# EAGLE board breakouts1-old (EAGLE 4.15)
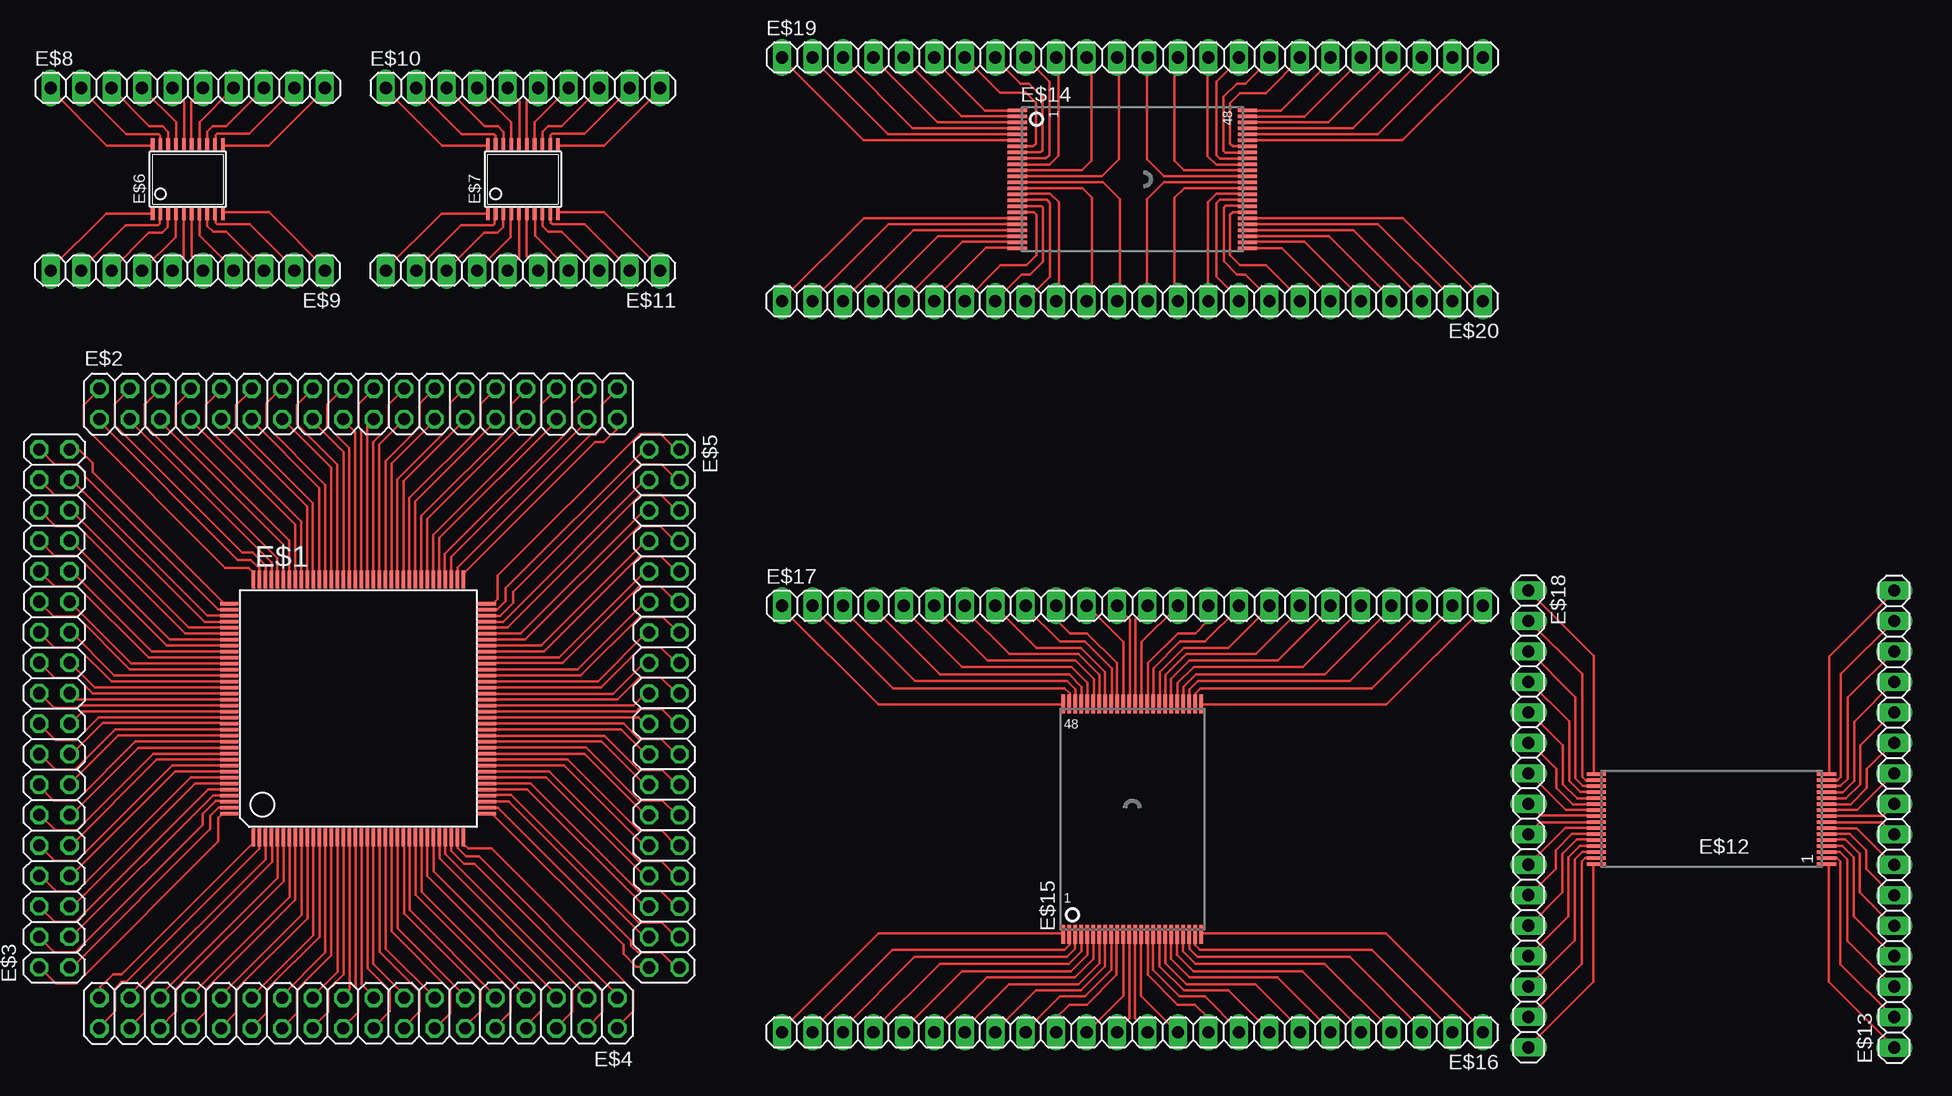
[diagram p0: board, top side]

No outline drawn. Coordinates in mm, seen from the top.
Copper layers (1*16): Top 0.035mm / dielectric 1.5mm / Bottom 0.035mm
Design rules "default": minimum track width 10mil, minimum drill 24mil, track to track 8mil, track to pad 8mil, pad to pad 8mil, via to via 8mil, smd to smd 8mil, copper to edge 40mil, drill to drill 8mil, minimum pad ring 10mil, minimum via ring 8mil, stop-mask expansion 4mil, vias tented up to drill 0mil, thermal gap 10mil

## Footprints (pad centres in the part's own frame; a part is rotated, then mirrored left to right if it is on the bottom)
TQFP144 = smd 0.27 x 1.5: 1 -8.75,-10.75; 2 -8.25,-10.75; 3 -7.75,-10.75; 4 -7.25,-10.75; 5 -6.75,-10.75; 6 -6.25,-10.75; 7 -5.75,-10.75; 8 -5.25,-10.75; 9 -4.75,-10.75; 10 -4.25,-10.75; 11 -3.75,-10.75; 12 -3.25,-10.75; 13 -2.75,-10.75; 14 -2.25,-10.75; 15 -1.75,-10.75; 16 -1.25,-10.75; 17 -0.75,-10.75; 18 -0.25,-10.75; 19 0.25,-10.75; 20 0.75,-10.75; 21 1.25,-10.75; 22 1.75,-10.75; 23 2.25,-10.75; 24 2.75,-10.75; 25 3.25,-10.75; 26 3.75,-10.75; 27 4.25,-10.75; 28 4.75,-10.75; 29 5.25,-10.75; 30 5.75,-10.75; 31 6.25,-10.75; 32 6.75,-10.75; 33 7.25,-10.75; 34 7.75,-10.75; 35 8.25,-10.75; 36 8.75,-10.75; 73 8.75,10.75; 74 8.25,10.75; 75 7.75,10.75; 76 7.25,10.75; 77 6.75,10.75; 78 6.25,10.75; 79 5.75,10.75; 80 5.25,10.75; 81 4.75,10.75; 82 4.25,10.75; 83 3.75,10.75; 84 3.25,10.75; 85 2.75,10.75; 86 2.25,10.75; 87 1.75,10.75; 88 1.25,10.75; 89 0.75,10.75; 90 0.25,10.75; 91 -0.25,10.75; 92 -0.75,10.75; 93 -1.25,10.75; 94 -1.75,10.75; 95 -2.25,10.75; 96 -2.75,10.75; 97 -3.25,10.75; 98 -3.75,10.75; 99 -4.25,10.75; 100 -4.75,10.75; 101 -5.25,10.75; 102 -5.75,10.75; 103 -6.25,10.75; 104 -6.75,10.75; 105 -7.25,10.75; 106 -7.75,10.75; 107 -8.25,10.75; 108 -8.75,10.75 | smd 1.5 x 0.27: 37 10.75,-8.75; 38 10.75,-8.25; 39 10.75,-7.75; 40 10.75,-7.25; 41 10.75,-6.75; 42 10.75,-6.25; 43 10.75,-5.75; 44 10.75,-5.25; 45 10.75,-4.75; 46 10.75,-4.25; 47 10.75,-3.75; 48 10.75,-3.25; 49 10.75,-2.75; 50 10.75,-2.25; 51 10.75,-1.75; 52 10.75,-1.25; 53 10.75,-0.75; 54 10.75,-0.25; 55 10.75,0.25; 56 10.75,0.75; 57 10.75,1.25; 58 10.75,1.75; 59 10.75,2.25; 60 10.75,2.75; 61 10.75,3.25; 62 10.75,3.75; 63 10.75,4.25; 64 10.75,4.75; 65 10.75,5.25; 66 10.75,5.75; 67 10.75,6.25; 68 10.75,6.75; 69 10.75,7.25; 70 10.75,7.75; 71 10.75,8.25; 72 10.75,8.75; 109 -10.75,8.75; 110 -10.75,8.25; 111 -10.75,7.75; 112 -10.75,7.25; 113 -10.75,6.75; 114 -10.75,6.25; 115 -10.75,5.75; 116 -10.75,5.25; 117 -10.75,4.75; 118 -10.75,4.25; 119 -10.75,3.75; 120 -10.75,3.25; 121 -10.75,2.75; 122 -10.75,2.25; 123 -10.75,1.75; 124 -10.75,1.25; 125 -10.75,0.75; 126 -10.75,0.25; 127 -10.75,-0.25; 128 -10.75,-0.75; 129 -10.75,-1.25; 130 -10.75,-1.75; 131 -10.75,-2.25; 132 -10.75,-2.75; 133 -10.75,-3.25; 134 -10.75,-3.75; 135 -10.75,-4.25; 136 -10.75,-4.75; 137 -10.75,-5.25; 138 -10.75,-5.75; 139 -10.75,-6.25; 140 -10.75,-6.75; 141 -10.75,-7.25; 142 -10.75,-7.75; 143 -10.75,-8.25; 144 -10.75,-8.75
2X18 = drill 1.016 octagon: 1 -21.59,-1.27; 2 -21.59,1.27; 3 -19.05,-1.27; 4 -19.05,1.27; 5 -16.51,-1.27; 6 -16.51,1.27; 7 -13.97,-1.27; 8 -13.97,1.27; 9 -11.43,-1.27; 10 -11.43,1.27; 11 -8.89,-1.27; 12 -8.89,1.27; 13 -6.35,-1.27; 14 -6.35,1.27; 15 -3.81,-1.27; 16 -3.81,1.27; 17 -1.27,-1.27; 18 -1.27,1.27; 19 1.27,-1.27; 20 1.27,1.27; 21 3.81,-1.27; 22 3.81,1.27; 23 6.35,-1.27; 24 6.35,1.27; 25 8.89,-1.27; 26 8.89,1.27; 27 11.43,-1.27; 28 11.43,1.27; 29 13.97,-1.27; 30 13.97,1.27; 31 16.51,-1.27; 32 16.51,1.27; 33 19.05,-1.27; 34 19.05,1.27; 35 21.59,-1.27; 36 21.59,1.27
TSSOP20 = smd 0.305 x 0.991: 1 -2.925,-2.918; 2 -2.275,-2.918; 3 -1.625,-2.918; 4 -0.975,-2.918; 5 -0.325,-2.918; 6 0.325,-2.918; 7 0.975,-2.918; 8 1.625,-2.918; 9 2.275,-2.918; 10 2.925,-2.918; 11 2.925,2.918; 12 2.275,2.918; 13 1.625,2.918; 14 0.975,2.918; 15 0.325,2.918; 16 -0.325,2.918; 17 -0.975,2.918; 18 -1.625,2.918; 19 -2.275,2.918; 20 -2.925,2.918
1X10 = drill 1.016 long: 1 -11.43,0; 2 -8.89,0; 3 -6.35,0; 4 -3.81,0; 5 -1.27,0; 6 1.27,0; 7 3.81,0; 8 6.35,0; 9 8.89,0; 10 11.43,0
TSOP32 = smd 0.3 x 1.6: 1 -3.75,-9.6; 2 -3.25,-9.6; 3 -2.75,-9.6; 4 -2.25,-9.6; 5 -1.75,-9.6; 6 -1.25,-9.6; 7 -0.75,-9.6; 8 -0.25,-9.6; 9 0.25,-9.6; 10 0.75,-9.6; 11 1.25,-9.6; 12 1.75,-9.6; 13 2.25,-9.6; 14 2.75,-9.6; 15 3.25,-9.6; 16 3.75,-9.6; 17 3.75,9.59; 18 3.25,9.59; 19 2.75,9.59; 20 2.25,9.59; 21 1.75,9.59; 22 1.25,9.59; 23 0.75,9.59; 24 0.25,9.59; 25 -0.25,9.59; 26 -0.75,9.59; 27 -1.25,9.59; 28 -1.75,9.59; 29 -2.25,9.59; 30 -2.75,9.59; 31 -3.25,9.59; 32 -3.75,9.59
1X16 = drill 1.016 long: 1 -19.05,0; 2 -16.51,0; 3 -13.97,0; 4 -11.43,0; 5 -8.89,0; 6 -6.35,0; 7 -3.81,0; 8 -1.27,0; 9 1.27,0; 10 3.81,0; 11 6.35,0; 12 8.89,0; 13 11.43,0; 14 13.97,0; 15 16.51,0; 16 19.05,0
TSOP48 = smd 0.3 x 1.6: 1 -5.75,-9.6; 2 -5.25,-9.6; 3 -4.75,-9.6; 4 -4.25,-9.6; 5 -3.75,-9.6; 6 -3.25,-9.6; 7 -2.75,-9.6; 8 -2.25,-9.6; 9 -1.75,-9.6; 10 -1.25,-9.6; 11 -0.75,-9.6; 12 -0.25,-9.6; 13 0.25,-9.6; 14 0.75,-9.6; 15 1.25,-9.6; 16 1.75,-9.6; 17 2.25,-9.6; 18 2.75,-9.6; 19 3.25,-9.6; 20 3.75,-9.6; 21 4.25,-9.6; 22 4.75,-9.6; 23 5.25,-9.6; 24 5.75,-9.6; 25 5.75,9.6; 26 5.25,9.6; 27 4.75,9.6; 28 4.25,9.6; 29 3.75,9.6; 30 3.25,9.6; 31 2.75,9.6; 32 2.25,9.6; 33 1.75,9.6; 34 1.25,9.6; 35 0.75,9.6; 36 0.25,9.6; 37 -0.25,9.6; 38 -0.75,9.6; 39 -1.25,9.6; 40 -1.75,9.6; 41 -2.25,9.6; 42 -2.75,9.6; 43 -3.25,9.6; 44 -3.75,9.6; 45 -4.25,9.6; 46 -4.75,9.6; 47 -5.25,9.6; 48 -5.75,9.6
1X24 = drill 1.016 long: 1 -29.21,0; 2 -26.67,0; 3 -24.13,0; 4 -21.59,0; 5 -19.05,0; 6 -16.51,0; 7 -13.97,0; 8 -11.43,0; 9 -8.89,0; 10 -6.35,0; 11 -3.81,0; 12 -1.27,0; 13 1.27,0; 14 3.81,0; 15 6.35,0; 16 8.89,0; 17 11.43,0; 18 13.97,0; 19 16.51,0; 20 19.05,0; 21 21.59,0; 22 24.13,0; 23 26.67,0; 24 29.21,0

## Placement (x,y rotation side)
E$1  [TQFP144]  29.47,29.53 0 top
E$2  [2X18]  29.47,54.93 0 top
E$3  [2X18]  4.12,29.55 90 top
E$4  [2X18]  29.46,4.14 180 top
E$5  [2X18]  54.96,29.53 270 top
E$6  [TSSOP20]  15.24,73.66 0 top
E$7  [TSSOP20]  43.18,73.66 0 top
E$8  [1X10]  15.24,81.28 0 top
E$9  [1X10]  15.24,66.05 180 top
E$10  [1X10]  43.18,81.28 0 top
E$11  [1X10]  43.18,66.05 180 top
E$12  [TSOP32]  142.24,20.32 90 top
E$13  [1X16]  157.48,20.32 90 top
E$14  [TSOP48]  93.98,73.66 270 top
E$15  [TSOP48]  93.98,20.32 0 top
E$16  [1X24]  93.98,2.54 180 top
E$17  [1X24]  93.98,38.1 0 top
E$18  [1X16]  127,20.33 270 top
E$19  [1X24]  93.98,83.82 0 top
E$20  [1X24]  93.98,63.5 180 top

## Library data of the parts
E$1 E$6 E$7 = ref-packages
E$2-E$5 E$8-E$11 E$13 E$16-E$20 = pinhead
E$12 = atmel
E$14 E$15 = am29-memory

## Tracks (layer width: path | path; a pad name or v marks a point on that pad's centre or on a via)
S$1
  Top 0.2: 23.72,40.74 23.72,43.56 14.22,53.06 14.22,54.79 15.56,56.12
S$2
  Top 0.2: 7.85,53.72 7.82,53.7
S$3
  Top 0.2: 23.2,40.84 23.2,43.19 12.94,53.45
S$4
  Top 0.2: 22.7,40.74 22.7,42.11 11.65,53.15 11.65,54.88 12.94,56.17
S$5
  Top 0.2: 22.23,40.77 22.23,41.71 10.47,53.48
S$6
  Top 0.2: 21.74,40.79 21.74,41.46 20.65,42.55 19.76,42.55 9.13,53.18 9.13,54.93 10.37,56.17
S$7
  Top 0.2: 21.2,40.74 21.2,41.24 20.5,41.93 19.42,41.93 7.77,53.58
S$8
  Top 0.2: 20.73,40.72 20.73,40.87 20.33,41.26 18.38,41.26 6.56,53.08 6.56,54.84 7.95,56.22
S$9
  Top 0.2: 24.21,40.74 24.21,44.87 15.46,53.62
S$10
  Top 0.2: 24.7,40.77 24.7,45.12 16.77,53.06 16.77,54.88 18.05,56.17
S$11
  Top 0.2: 25.2,40.45 25.2,46.38 18.01,53.58
S$12
  Top 0.2: 25.67,40.77 25.67,46.68 19.29,53.06 19.29,54.84 20.55,56.1
S$13
  Top 0.2: 26.19,40.77 26.19,47.94 20.55,53.58 20.55,53.55
S$14
  Top 0.2: 26.71,40.74 26.71,48.19 21.81,53.08 21.81,55.01 23.05,56.24
S$15
  Top 0.2: 27.2,40.67 27.2,49.62 23.12,53.7
S$16
  Top 0.2: 27.7,40.74 27.7,49.87 24.36,53.2 24.36,54.86 25.62,56.12
S$17
  Top 0.2: 28.24,40.79 28.24,50.91 25.62,53.52
S$18
  Top 0.2: 28.71,40.7 28.71,51.25 26.86,53.1 26.86,54.86 28.16,56.17
S$19
  Top 0.2: 29.2,40.7 29.2,52.59 28.19,53.6
S$20
  Top 0.2: 29.7,40.62 29.7,52.81 29.5,53.01 29.5,54.93 30.76,56.2 30.76,56.15
S$21
  Top 0.2: 30.19,40.82 30.19,53.03 30.76,53.6
S$22
  Top 0.2: 30.71,40.77 30.71,51.74 32,53.03 32,54.88 33.21,56.1
S$23
  Top 0.2: 31.2,40.79 31.2,51.55 33.26,53.6
S$24
  Top 0.2: 31.72,40.82 31.72,50.16 34.57,53.01 34.57,54.96 35.83,56.22
S$25
  Top 0.2: 32.22,40.79 32.22,49.94 35.9,53.62
S$26
  Top 0.2: 32.71,40.79 32.71,48.63 37.11,53.03 37.11,54.98 38.3,56.17
S$27
  Top 0.2: 33.23,40.84 33.23,48.51 38.27,53.55
S$28
  Top 0.2: 33.7,40.82 33.7,47.07 39.63,53.01 39.63,54.91 40.89,56.17
S$29
  Top 0.2: 34.2,40.77 34.2,46.8 40.89,53.5
S$30
  Top 0.2: 34.72,40.74 34.72,45.57 42.18,53.03 42.18,54.88 43.49,56.2
S$31
  Top 0.2: 35.21,40.77 35.21,45.32 43.41,53.52
S$32
  Top 0.2: 35.7,40.82 35.7,44.01 44.68,52.98 44.68,54.86 45.99,56.17 45.99,56.12
S$33
  Top 0.2: 36.2,40.77 36.2,43.74 46.01,53.55
S$34
  Top 0.2: 36.67,40.79 36.67,42.4 47.27,53.01 47.27,54.91 48.53,56.17
S$35
  Top 0.2: 37.21,40.87 37.21,42.18 48.51,53.48
S$36
  Top 0.2: 37.73,40.67 37.73,41.29 48.83,52.39 49.22,52.39 49.79,52.96 49.79,54.88 51.03,56.12 51.03,56.15
S$37
  Top 0.2: 38.2,40.77 49.17,51.74 49.92,51.74 50.98,52.81 50.98,53.5
S$38
  Top 0.2: 5.33,7.93 5.35,7.9
S$39
  Top 0.2: 18.31,24.29 14.18,24.29 5.43,15.54
S$40
  Top 0.2: 18.28,24.79 13.93,24.79 6,16.85 4.17,16.85 2.88,18.14
S$41
  Top 0.2: 18.6,25.28 12.67,25.28 5.48,18.09
S$42
  Top 0.2: 18.28,25.75 12.37,25.75 6,19.37 4.22,19.37 2.96,20.63
S$43
  Top 0.2: 18.28,26.27 11.11,26.27 5.48,20.63 5.5,20.63
S$44
  Top 0.2: 18.31,26.79 10.87,26.79 5.97,21.89 4.04,21.89 2.81,23.13
S$45
  Top 0.2: 18.38,27.28 9.43,27.28 5.35,23.2
S$46
  Top 0.2: 18.31,27.78 9.19,27.78 5.85,24.44 4.19,24.44 2.93,25.7
S$47
  Top 0.2: 18.26,28.32 8.15,28.32 5.53,25.7
S$48
  Top 0.2: 18.36,28.79 7.8,28.79 5.95,26.94 4.19,26.94 2.88,28.25
S$49
  Top 0.2: 18.36,29.28 6.47,29.28 5.45,28.27
S$50
  Top 0.2: 18.43,29.78 6.24,29.78 6.05,29.58 4.12,29.58 2.86,30.84 2.91,30.84
S$51
  Top 0.2: 18.23,30.27 6.02,30.27 5.45,30.84
S$52
  Top 0.2: 18.28,30.79 7.31,30.79 6.02,32.08 4.17,32.08 2.96,33.29
S$53
  Top 0.2: 18.26,31.29 7.5,31.29 5.45,33.34
S$54
  Top 0.2: 18.23,31.8 8.89,31.8 6.05,34.65 4.09,34.65 2.83,35.91
S$55
  Top 0.2: 18.26,32.3 9.11,32.3 5.43,35.98
S$56
  Top 0.2: 18.26,32.79 10.42,32.79 6.02,37.19 4.07,37.19 2.88,38.38
S$57
  Top 0.2: 18.21,33.31 10.54,33.31 5.5,38.35
S$58
  Top 0.2: 18.23,33.78 11.98,33.78 6.05,39.72 4.14,39.72 2.88,40.98
S$59
  Top 0.2: 18.28,34.28 12.25,34.28 5.55,40.98
S$60
  Top 0.2: 18.31,34.8 13.49,34.8 6.02,42.26 4.17,42.26 2.86,43.57
S$61
  Top 0.2: 18.28,35.29 13.73,35.29 5.53,43.5
S$62
  Top 0.2: 18.23,35.78 15.04,35.78 6.07,44.76 4.19,44.76 2.88,46.07 2.93,46.07
S$63
  Top 0.2: 18.28,36.28 15.31,36.28 5.5,46.09
S$64
  Top 0.2: 18.26,36.75 16.65,36.75 6.05,47.35 4.14,47.35 2.88,48.61
S$65
  Top 0.2: 18.18,37.29 16.87,37.29 5.58,48.59
S$66
  Top 0.2: 18.38,37.81 17.76,37.81 6.66,48.91 6.66,49.3 6.1,49.87 4.17,49.87 2.93,51.11 2.91,51.11
S$67
  Top 0.2: 18.28,38.28 7.31,49.26 7.31,50 6.24,51.06 5.55,51.06
S$68
  Top 0.2: 18.31,23.8 15.49,23.8 6,14.31 4.27,14.31 2.93,15.64
S$69
  Top 0.2: 18.21,23.28 15.86,23.28 5.6,13.02
S$70
  Top 0.2: 18.31,22.78 16.95,22.78 5.9,11.73 4.17,11.73 2.88,13.02
S$71
  Top 0.2: 18.28,22.31 17.34,22.31 5.58,10.55
S$72
  Top 0.2: 18.26,21.82 17.59,21.82 16.5,20.73 16.5,19.84 5.87,9.21 4.12,9.21 2.88,10.45
S$73
  Top 0.2: 18.31,21.28 17.81,21.28 17.12,20.58 17.12,19.5 5.48,7.85
S$74
  Top 0.2: 18.33,20.81 18.18,20.81 17.79,20.41 17.79,18.46 5.97,6.64 4.22,6.64 2.83,8.03
S$75
  Top 0.2: 51.08,5.42 51.11,5.44
S$76
  Top 0.2: 34.72,18.39 34.72,14.26 43.47,5.51
S$77
  Top 0.2: 34.23,18.37 34.23,14.02 42.16,6.08 42.16,4.25 40.87,2.97
S$78
  Top 0.2: 33.73,18.69 33.73,12.76 40.92,5.56
S$79
  Top 0.2: 33.26,18.37 33.26,12.46 39.64,6.08 39.64,4.3 38.38,3.04
S$80
  Top 0.2: 32.74,18.37 32.74,11.2 38.38,5.56 38.38,5.59
S$81
  Top 0.2: 32.22,18.39 32.22,10.95 37.12,6.06 37.12,4.13 35.88,2.89
S$82
  Top 0.2: 31.73,18.47 31.73,9.52 35.81,5.44
S$83
  Top 0.2: 31.23,18.39 31.23,9.27 34.57,5.93 34.57,4.28 33.31,3.02
S$84
  Top 0.2: 30.69,18.34 30.69,8.23 33.31,5.61
S$85
  Top 0.2: 30.22,18.44 30.22,7.89 32.07,6.03 32.07,4.28 30.76,2.97
S$86
  Top 0.2: 29.73,18.44 29.73,6.55 30.74,5.54
S$87
  Top 0.2: 29.23,18.52 29.23,6.33 29.43,6.13 29.43,4.2 28.17,2.94 28.17,2.99
S$88
  Top 0.2: 28.74,18.32 28.74,6.11 28.17,5.54
S$89
  Top 0.2: 28.22,18.37 28.22,7.39 26.93,6.11 26.93,4.25 25.72,3.04
S$90
  Top 0.2: 27.72,18.34 27.72,7.59 25.67,5.54
S$91
  Top 0.2: 27.2,18.32 27.2,8.97 24.36,6.13 24.36,4.18 23.1,2.92
S$92
  Top 0.2: 26.71,18.34 26.71,9.2 23.03,5.51
S$93
  Top 0.2: 26.22,18.34 26.22,10.51 21.82,6.11 21.82,4.15 20.63,2.97
S$94
  Top 0.2: 25.7,18.29 25.7,10.63 20.66,5.59
S$95
  Top 0.2: 25.23,18.32 25.23,12.06 19.3,6.13 19.3,4.23 18.04,2.97
S$96
  Top 0.2: 24.73,18.37 24.73,12.34 18.04,5.64
S$97
  Top 0.2: 24.21,18.39 24.21,13.57 16.75,6.11 16.75,4.25 15.44,2.94
S$98
  Top 0.2: 23.72,18.37 23.72,13.82 15.51,5.61
S$99
  Top 0.2: 23.23,18.32 23.23,15.13 14.25,6.16 14.25,4.28 12.94,2.97 12.94,3.02
S$100
  Top 0.2: 22.73,18.37 22.73,15.4 12.92,5.59
S$101
  Top 0.2: 22.26,18.34 22.26,16.73 11.66,6.13 11.66,4.23 10.4,2.97
S$102
  Top 0.2: 21.72,18.27 21.72,16.96 10.42,5.66
S$103
  Top 0.2: 21.2,18.47 21.2,17.85 10.1,6.75 9.71,6.75 9.14,6.18 9.14,4.25 7.9,3.02 7.9,2.99
S$104
  Top 0.2: 20.73,18.37 9.75,7.39 9.01,7.39 7.95,6.33 7.95,5.64
S$105
  Top 0.2: 35.21,18.39 35.21,15.57 44.7,6.08 44.7,4.35 43.37,3.02
S$106
  Top 0.2: 35.73,18.29 35.73,15.94 45.99,5.69
S$107
  Top 0.2: 36.23,18.39 36.23,17.03 47.27,5.98 47.27,4.25 45.99,2.97
S$108
  Top 0.2: 36.7,18.37 36.7,17.43 48.46,5.66
S$109
  Top 0.2: 37.19,18.34 37.19,17.68 38.28,16.59 39.17,16.59 49.8,5.96 49.8,4.2 48.56,2.97
S$110
  Top 0.2: 37.73,18.39 37.73,17.9 38.43,17.21 39.51,17.21 51.16,5.56
S$111
  Top 0.2: 38.2,18.42 38.2,18.27 38.6,17.87 40.55,17.87 52.37,6.06 52.37,4.3 50.98,2.92
S$112
  Top 0.2: 53.53,51.15 53.51,51.17
S$113
  Top 0.2: 40.55,34.78 44.68,34.78 53.43,43.53
S$114
  Top 0.2: 40.58,34.29 44.93,34.29 52.87,42.22 54.69,42.22 55.98,40.94
S$115
  Top 0.2: 40.26,33.8 46.19,33.8 53.38,40.99
S$116
  Top 0.2: 40.58,33.33 46.49,33.33 52.87,39.7 54.65,39.7 55.91,38.44
S$117
  Top 0.2: 40.58,32.81 47.75,32.81 53.38,38.44 53.36,38.44
S$118
  Top 0.2: 40.55,32.29 47.99,32.29 52.89,37.18 54.82,37.18 56.05,35.95
S$119
  Top 0.2: 40.48,31.79 49.43,31.79 53.51,35.87
S$120
  Top 0.2: 40.55,31.3 49.68,31.3 53.01,34.64 54.67,34.64 55.93,33.38
S$121
  Top 0.2: 40.6,30.75 50.71,30.75 53.33,33.38
S$122
  Top 0.2: 40.51,30.29 51.06,30.29 52.91,32.14 54.67,32.14 55.98,30.83
S$123
  Top 0.2: 40.51,29.79 52.4,29.79 53.41,30.8
S$124
  Top 0.2: 40.43,29.3 52.62,29.3 52.81,29.49 54.74,29.49 56,28.23 55.95,28.23
S$125
  Top 0.2: 40.63,28.8 52.84,28.8 53.41,28.23
S$126
  Top 0.2: 40.58,28.28 51.55,28.28 52.84,27 54.69,27 55.91,25.79
S$127
  Top 0.2: 40.6,27.79 51.36,27.79 53.41,25.74
S$128
  Top 0.2: 40.63,27.27 49.97,27.27 52.81,24.43 54.77,24.43 56.03,23.17
S$129
  Top 0.2: 40.6,26.78 49.75,26.78 53.43,23.09
S$130
  Top 0.2: 40.6,26.28 48.44,26.28 52.84,21.88 54.79,21.88 55.98,20.7
S$131
  Top 0.2: 40.65,25.76 48.32,25.76 53.36,20.72
S$132
  Top 0.2: 40.63,25.29 46.88,25.29 52.81,19.36 54.72,19.36 55.98,18.1
S$133
  Top 0.2: 40.58,24.8 46.61,24.8 53.31,18.1
S$134
  Top 0.2: 40.55,24.28 45.38,24.28 52.84,16.82 54.69,16.82 56,15.51
S$135
  Top 0.2: 40.58,23.79 45.13,23.79 53.33,15.58
S$136
  Top 0.2: 40.63,23.29 43.82,23.29 52.79,14.32 54.67,14.32 55.98,13.01 55.93,13.01
S$137
  Top 0.2: 40.58,22.8 43.55,22.8 53.36,12.98
S$138
  Top 0.2: 40.6,22.33 42.21,22.33 52.81,11.72 54.72,11.72 55.98,10.46
S$139
  Top 0.2: 40.68,21.78 41.99,21.78 53.28,10.49
S$140
  Top 0.2: 40.48,21.26 41.1,21.26 52.2,10.16 52.2,9.77 52.77,9.2 54.69,9.2 55.93,7.97 55.95,7.97
S$141
  Top 0.2: 40.58,20.79 51.55,9.82 51.55,9.08 52.62,8.02 53.31,8.02
S$142
  Top 0.2: 40.55,35.28 43.37,35.28 52.87,44.77 54.59,44.77 55.93,43.44
S$143
  Top 0.2: 40.65,35.8 43,35.8 53.26,46.05
S$144
  Top 0.2: 40.55,36.29 41.91,36.29 52.96,47.34 54.69,47.34 55.98,46.05
S$145
  Top 0.2: 40.58,36.76 41.52,36.76 53.28,48.53
S$146
  Top 0.2: 40.6,37.26 41.27,37.26 42.36,38.34 42.36,39.23 52.99,49.86 54.74,49.86 55.98,48.62
S$147
  Top 0.2: 40.55,37.8 41.05,37.8 41.74,38.49 41.74,39.58 53.38,51.22
S$148
  Top 0.2: 40.53,38.27 40.68,38.27 41.07,38.66 41.07,40.62 52.89,52.43 54.65,52.43 56.03,51.05
S$149
  Top 0.2: 12.35,76.45 8.5,76.45 3.72,81.23
S$150
  Top 0.2: 12.94,76.49 12.94,77.3 12.81,77.43 10.12,77.43 6.41,81.15
S$151
  Top 0.2: 13.63,76.62 13.63,77.6 13.16,78.07 12.04,78.07 8.93,81.19
S$152
  Top 0.2: 14.27,76.62 14.27,78.41 11.53,81.15
S$153
  Top 0.2: 14.95,76.62 14.95,80.12 13.93,81.15
S$154
  Top 0.2: 18.16,70.91 22.01,70.91 26.79,66.12
S$155
  Top 0.2: 17.57,70.86 17.57,70.05 17.69,69.92 20.39,69.92 24.1,66.21
S$156
  Top 0.2: 16.88,70.74 16.88,69.75 17.35,69.28 18.46,69.28 21.58,66.17
S$157
  Top 0.2: 16.24,70.74 16.24,68.94 18.98,66.21
S$158
  Top 0.2: 15.56,70.74 15.56,67.23 16.58,66.21
S$159
  Top 0.2: 12.3,70.81 8.46,70.81 3.67,66.03
S$160
  Top 0.2: 12.9,70.77 12.9,69.96 12.77,69.83 10.08,69.83 6.36,66.12
S$161
  Top 0.2: 13.58,70.64 13.58,69.66 13.11,69.19 12,69.19 8.88,66.07
S$162
  Top 0.2: 14.22,70.64 14.22,68.85 11.49,66.12
S$163
  Top 0.2: 14.91,70.64 14.91,67.14 13.88,66.12
S$164
  Top 0.2: 18.15,76.47 22,76.47 26.78,81.26
S$165
  Top 0.2: 17.55,76.52 17.55,77.33 17.68,77.46 20.37,77.46 24.09,81.17
S$166
  Top 0.2: 16.87,76.64 16.87,77.63 17.34,78.1 18.45,78.1 21.57,81.22
S$167
  Top 0.2: 16.23,76.64 16.23,78.44 18.96,81.17
S$168
  Top 0.2: 15.54,76.64 15.54,80.15 16.57,81.17
S$169
  Top 0.2: 40.28,76.45 36.44,76.45 31.66,81.23
S$170
  Top 0.2: 40.88,76.49 40.88,77.3 40.76,77.43 38.06,77.43 34.35,81.15
S$171
  Top 0.2: 41.57,76.62 41.57,77.6 41.1,78.07 39.98,78.07 36.87,81.19
S$172
  Top 0.2: 42.21,76.62 42.21,78.41 39.47,81.15
S$173
  Top 0.2: 42.89,76.62 42.89,80.12 41.87,81.15
S$174
  Top 0.2: 46.1,70.91 49.95,70.91 54.73,66.12
S$175
  Top 0.2: 45.51,70.86 45.51,70.05 45.63,69.92 48.33,69.92 52.04,66.21
S$176
  Top 0.2: 44.82,70.74 44.82,69.75 45.29,69.28 46.4,69.28 49.52,66.17
S$177
  Top 0.2: 44.18,70.74 44.18,68.94 46.91,66.21
S$178
  Top 0.2: 43.5,70.74 43.5,67.23 44.52,66.21
S$179
  Top 0.2: 40.24,70.81 36.4,70.81 31.61,66.03
S$180
  Top 0.2: 40.84,70.77 40.84,69.96 40.71,69.83 38.02,69.83 34.3,66.12
S$181
  Top 0.2: 41.52,70.64 41.52,69.66 41.05,69.19 39.94,69.19 36.82,66.07
S$182
  Top 0.2: 42.16,70.64 42.16,68.85 39.43,66.12
S$183
  Top 0.2: 42.85,70.64 42.85,67.14 41.82,66.12
S$184
  Top 0.2: 46.09,76.47 49.94,76.47 54.72,81.26
S$185
  Top 0.2: 45.49,76.52 45.49,77.33 45.62,77.46 48.31,77.46 52.03,81.17
S$186
  Top 0.2: 44.81,76.64 44.81,77.63 45.28,78.1 46.39,78.1 49.51,81.22
S$187
  Top 0.2: 44.17,76.64 44.17,78.44 46.9,81.17
S$188
  Top 0.2: 43.48,76.64 43.48,80.15 44.51,81.17
S$189
  Top 0.2: 152.02,16.56 152.02,6.75 157.56,1.2
S$190
  Top 0.2: 152.14,17.1 152.7,17.1 153,16.8 153,8.23 157.47,3.75
S$191
  Top 0.2: 152.16,17.57 152.94,17.57 153.56,16.95 153.56,10.19 157.5,6.24
S$192
  Top 0.2: 152.08,18.08 153.14,18.08 154.09,17.13 154.09,12.2 157.47,8.82
S$193
  Top 0.2: 151.96,18.61 153.41,18.61 154.6,17.42 154.6,14.19 157.44,11.34
S$194
  Top 0.2: 152.14,19.09 153.8,19.09 155.16,17.72 155.16,16.15 157.41,13.89
S$195
  Top 0.2: 152.19,19.56 154.36,19.56 157.44,16.48
S$196
  Top 0.2: 152.11,20.03 156.47,20.03 157.5,19
S$197
  Top 0.2: 152.07,24.07 152.07,33.89 157.62,39.44
S$198
  Top 0.2: 152.19,23.54 152.75,23.54 153.05,23.84 153.05,32.41 157.53,36.89
S$199
  Top 0.2: 152.22,23.07 152.99,23.07 153.61,23.69 153.61,30.45 157.56,34.4
S$200
  Top 0.2: 152.13,22.56 153.2,22.56 154.15,23.51 154.15,28.43 157.53,31.81
S$201
  Top 0.2: 152.01,22.03 153.46,22.03 154.65,23.21 154.65,26.45 157.5,29.29
S$202
  Top 0.2: 152.19,21.55 153.85,21.55 155.21,22.92 155.21,24.49 157.47,26.74
S$203
  Top 0.2: 152.25,21.08 154.41,21.08 157.5,24.16
S$204
  Top 0.2: 152.16,20.6 156.52,20.6 157.56,21.64
S$205
  Top 0.2: 132.46,24.08 132.46,33.9 126.92,39.45
S$206
  Top 0.2: 132.34,23.55 131.78,23.55 131.48,23.84 131.48,32.42 127,36.89
S$207
  Top 0.2: 132.31,23.07 131.54,23.07 130.92,23.7 130.92,30.46 126.98,34.4
S$208
  Top 0.2: 132.4,22.57 131.34,22.57 130.39,23.52 130.39,28.44 127,31.82
S$209
  Top 0.2: 99.71,10.78 115.13,10.78 123.25,2.67
S$210
  Top 0.2: 99.2,10.78 99.2,9.84 99.62,9.42 113.94,9.42 120.68,2.67
S$211
  Top 0.2: 98.73,10.57 98.73,9.5 99.41,8.82 112.1,8.82 118.16,2.75
S$212
  Top 0.2: 98.22,10.57 98.22,9.29 99.24,8.26 110.01,8.26 115.69,2.58
S$213
  Top 0.2: 97.7,10.61 97.7,8.99 99.07,7.62 108.17,7.62 113.12,2.67
S$214
  Top 0.2: 97.19,10.48 97.19,8.65 98.73,7.11 106.08,7.11 110.56,2.63
S$215
  Top 0.2: 96.72,10.53 96.72,8.31 98.47,6.56 104.24,6.56 107.95,2.84
S$216
  Top 0.2: 96.25,10.74 96.25,8.05 98.26,6.04 101.97,6.04 105.31,2.71
S$217
  Top 0.2: 95.69,10.57 95.69,7.75 97.92,5.53 100.01,5.53 102.83,2.71
S$218
  Top 0.2: 95.27,10.48 95.27,7.33 97.75,4.85 99.2,4.85 100.31,3.74 100.31,2.54
S$219
  Top 0.2: 94.71,10.53 94.71,5.57 97.66,2.63
S$220
  Top 0.2: 94.2,10.48 94.2,3.69 95.31,2.58
S$221
  Top 0.2: 88.23,10.78 72.81,10.78 64.69,2.67
S$222
  Top 0.2: 88.74,10.78 88.74,9.84 88.31,9.42 74,9.42 67.25,2.67
S$223
  Top 0.2: 89.21,10.57 89.21,9.5 88.53,8.82 75.84,8.82 69.78,2.75
S$224
  Top 0.2: 89.72,10.57 89.72,9.29 88.7,8.26 77.93,8.26 72.25,2.58
S$225
  Top 0.2: 90.24,10.61 90.24,8.99 88.87,7.62 79.77,7.62 74.82,2.67
S$226
  Top 0.2: 90.75,10.48 90.75,8.65 89.21,7.11 81.86,7.11 77.38,2.63
S$227
  Top 0.2: 91.22,10.53 91.22,8.31 89.47,6.56 83.7,6.56 79.98,2.84
S$228
  Top 0.2: 91.69,10.74 91.69,8.05 89.68,6.04 85.96,6.04 82.63,2.71
S$229
  Top 0.2: 92.24,10.57 92.24,7.75 90.02,5.53 87.93,5.53 85.11,2.71
S$230
  Top 0.2: 92.67,10.48 92.67,7.33 90.19,4.85 88.74,4.85 87.63,3.74 87.63,2.54
S$231
  Top 0.2: 93.23,10.53 93.23,5.57 90.28,2.63
S$232
  Top 0.2: 93.74,10.48 93.74,3.69 92.63,2.58
S$233
  Top 0.2: 88.25,29.86 72.83,29.86 64.71,37.97
S$234
  Top 0.2: 88.76,29.86 88.76,30.8 88.33,31.22 74.03,31.22 67.28,37.97
S$235
  Top 0.2: 89.23,30.07 89.23,31.14 88.55,31.82 75.86,31.82 69.8,37.89
S$236
  Top 0.2: 89.75,30.07 89.75,31.35 88.72,32.38 77.95,32.38 72.27,38.06
S$237
  Top 0.2: 90.26,30.03 90.26,31.65 88.89,33.02 79.79,33.02 74.84,37.97
S$238
  Top 0.2: 90.77,30.16 90.77,31.99 89.23,33.53 81.88,33.53 77.4,38.01
S$239
  Top 0.2: 91.24,30.11 91.24,32.33 89.49,34.08 83.72,34.08 80,37.8
S$240
  Top 0.2: 91.71,29.9 91.71,32.59 89.7,34.6 85.98,34.6 82.65,37.93
S$241
  Top 0.2: 92.27,30.07 92.27,32.89 90.04,35.11 87.95,35.11 85.13,37.93
S$242
  Top 0.2: 92.69,30.16 92.69,33.31 90.22,35.79 88.76,35.79 87.65,36.9 87.65,38.1
S$243
  Top 0.2: 93.25,30.11 93.25,35.07 90.3,38.01
S$244
  Top 0.2: 93.76,30.16 93.76,36.95 92.65,38.06
S$245
  Top 0.2: 99.73,29.86 115.15,29.86 123.27,37.97
S$246
  Top 0.2: 99.22,29.86 99.22,30.8 99.65,31.22 113.96,31.22 120.7,37.97
S$247
  Top 0.2: 98.75,30.07 98.75,31.14 99.43,31.82 112.12,31.82 118.19,37.89
S$248
  Top 0.2: 98.24,30.07 98.24,31.35 99.26,32.38 110.03,32.38 115.71,38.06
S$249
  Top 0.2: 97.72,30.03 97.72,31.65 99.09,33.02 108.19,33.02 113.14,37.97
S$250
  Top 0.2: 97.21,30.16 97.21,31.99 98.75,33.53 106.1,33.53 110.58,38.01
S$251
  Top 0.2: 96.74,30.11 96.74,32.33 98.49,34.08 104.26,34.08 107.98,37.8
S$252
  Top 0.2: 96.27,29.9 96.27,32.59 98.28,34.6 102,34.6 105.33,37.93
S$253
  Top 0.2: 95.72,30.07 95.72,32.89 97.94,35.11 100.03,35.11 102.85,37.93
S$254
  Top 0.2: 95.29,30.16 95.29,33.31 97.77,35.79 99.22,35.79 100.33,36.9 100.33,38.1
S$255
  Top 0.2: 94.73,30.11 94.73,35.07 97.68,38.01
S$256
  Top 0.2: 94.22,30.16 94.22,36.95 95.33,38.06
S$257
  Top 0.2: 132.52,22.04 131.07,22.04 129.88,23.22 129.88,26.45 127.03,29.3
S$258
  Top 0.2: 132.34,21.56 130.68,21.56 129.32,22.92 129.32,24.5 127.06,26.75
S$259
  Top 0.2: 132.28,21.09 130.12,21.09 127.03,24.17
S$260
  Top 0.2: 132.37,20.61 128.01,20.61 126.98,21.65
S$261
  Top 0.2: 132.41,16.57 132.41,6.75 126.86,1.21
S$262
  Top 0.2: 132.29,17.11 131.73,17.11 131.43,16.81 131.43,8.24 126.95,3.76
S$263
  Top 0.2: 132.26,17.58 131.49,17.58 130.87,16.96 130.87,10.2 126.92,6.25
S$264
  Top 0.2: 132.35,18.09 131.28,18.09 130.34,17.14 130.34,12.21 126.95,8.83
S$265
  Top 0.2: 132.47,18.62 131.02,18.62 129.83,17.43 129.83,14.2 126.98,11.35
S$266
  Top 0.2: 132.29,19.09 130.63,19.09 129.27,17.73 129.27,16.16 127.01,13.9
S$267
  Top 0.2: 132.23,19.57 130.07,19.57 126.98,16.48
S$268
  Top 0.2: 132.32,20.04 127.96,20.04 126.92,19
S$269
  Top 0.2: 84.6,73.92 91.45,73.92 92.88,75.34 92.88,83.59 92.7,83.77
S$270
  Top 0.2: 84.9,74.42 89.76,74.42 90.56,75.22 90.56,83.38 90.12,83.82
S$271
  Top 0.2: 84.81,74.87 87.06,74.87 87.8,75.61 87.8,83.68 87.71,83.77
S$272
  Top 0.2: 84.78,75.4 86.79,75.4 87.06,75.67 87.06,81.81 85.13,83.73
S$273
  Top 0.2: 84.39,75.91 86.32,75.91 86.47,76.05 86.47,80.53 85.37,81.63 84.66,81.63 82.58,83.71
S$274
  Top 0.2: 84.24,76.41 85.7,76.41 85.93,76.65 85.93,80.03 85.1,80.86 82.94,80.86 79.97,83.82
S$275
  Top 0.2: 84.36,79.38 81.69,79.38 77.45,83.62
S$276
  Top 0.2: 84.27,78.9 79.73,78.9 74.9,83.73
S$277
  Top 0.2: 84.3,78.43 77.72,78.43 72.41,83.73
S$278
  Top 0.2: 84.36,77.92 75.67,77.92 69.8,83.8
S$279
  Top 0.2: 84.33,77.42 73.6,77.42 67.22,83.8
S$280
  Top 0.2: 84.27,76.91 71.55,76.91 64.73,83.73
S$281
  Top 0.2: 103.46,73.43 96.61,73.43 95.19,72.01 95.19,63.76 95.36,63.58
S$282
  Top 0.2: 103.17,72.93 98.3,72.93 97.5,72.12 97.5,63.97 97.94,63.52
S$283
  Top 0.2: 103.25,72.48 101,72.48 100.26,71.74 100.26,63.67 100.35,63.58
S$284
  Top 0.2: 103.28,71.95 101.27,71.95 101,71.68 101,65.54 102.93,63.61
S$285
  Top 0.2: 103.67,71.44 101.74,71.44 101.59,71.29 101.59,66.82 102.69,65.72 103.4,65.72 105.48,63.64
S$286
  Top 0.2: 103.82,70.94 102.36,70.94 102.13,70.7 102.13,67.32 102.96,66.49 105.12,66.49 108.09,63.52
S$287
  Top 0.2: 103.77,67.9 106.45,67.9 110.61,63.73
S$288
  Top 0.2: 103.79,68.45 108.33,68.45 113.16,63.61
S$289
  Top 0.2: 103.76,68.92 110.34,68.92 115.65,63.61
S$290
  Top 0.2: 103.7,69.43 112.39,69.43 118.26,63.55
S$291
  Top 0.2: 103.73,69.93 114.47,69.93 120.84,63.55
S$292
  Top 0.2: 103.79,70.43 116.51,70.43 123.33,63.61
S$293
  Top 0.2: 84.67,73.43 91.52,73.43 92.94,72 92.94,63.76 92.76,63.58
S$294
  Top 0.2: 84.96,72.92 89.83,72.92 90.63,72.12 90.63,63.97 90.18,63.52
S$295
  Top 0.2: 84.87,72.48 87.13,72.48 87.87,71.73 87.87,63.67 87.78,63.58
S$296
  Top 0.2: 84.84,71.94 86.86,71.94 87.13,71.68 87.13,65.54 85.2,63.61
S$297
  Top 0.2: 84.46,71.44 86.39,71.44 86.53,71.29 86.53,66.81 85.44,65.72 84.72,65.72 82.65,63.64
S$298
  Top 0.2: 84.31,70.93 85.76,70.93 86,70.7 86,67.32 85.17,66.49 83,66.49 80.04,63.52
S$299
  Top 0.2: 84.43,67.97 81.76,67.97 77.52,63.73
S$300
  Top 0.2: 84.34,68.44 79.8,68.44 74.97,63.61
S$301
  Top 0.2: 84.37,68.92 77.78,68.92 72.47,63.61
S$302
  Top 0.2: 84.43,69.42 75.74,69.42 69.86,63.55
S$303
  Top 0.2: 84.4,69.93 73.66,69.93 67.28,63.55
S$304
  Top 0.2: 84.34,70.43 71.61,70.43 64.79,63.61
S$305
  Top 0.2: 103.45,73.91 96.6,73.91 95.18,75.33 95.18,83.58 95.36,83.76
S$306
  Top 0.2: 103.16,74.41 98.29,74.41 97.49,75.21 97.49,83.37 97.94,83.82
S$307
  Top 0.2: 103.25,74.86 100.99,74.86 100.25,75.6 100.25,83.67 100.34,83.76
S$308
  Top 0.2: 103.28,75.39 101.26,75.39 100.99,75.66 100.99,81.8 102.92,83.73
S$309
  Top 0.2: 103.66,75.9 101.73,75.9 101.59,76.05 101.59,80.52 102.68,81.62 103.4,81.62 105.47,83.7
S$310
  Top 0.2: 103.81,76.4 102.36,76.4 102.12,76.64 102.12,80.02 102.95,80.85 105.12,80.85 108.08,83.82
S$311
  Top 0.2: 103.69,79.37 106.36,79.37 110.6,83.61
S$312
  Top 0.2: 103.78,78.89 108.32,78.89 113.15,83.73
S$313
  Top 0.2: 103.75,78.42 110.34,78.42 115.64,83.73
S$314
  Top 0.2: 103.69,77.91 112.38,77.91 118.25,83.79
S$315
  Top 0.2: 103.72,77.41 114.46,77.41 120.83,83.79
S$316
  Top 0.2: 103.78,76.91 116.5,76.91 123.33,83.73